# Altium PCB 400861.PcbDoc (part 7 of 7)
Units mm, origin at the board's own origin, x right, y up, seen from the top; angles counter-clockwise.
Board outline 145 x 63.5 mm, 8 copper layers (Top Side, Mid-Layer 1, Mid-Layer 2, Mid-Layer 3, Mid-Layer 4, Mid-Layer 5, Mid-Layer 6, Bottom Side), stack 1.529 mm thick; 287 components, 241 nets, 1164 pads, 3527 vias.
Unrouted connection lines stored in the file: 1.
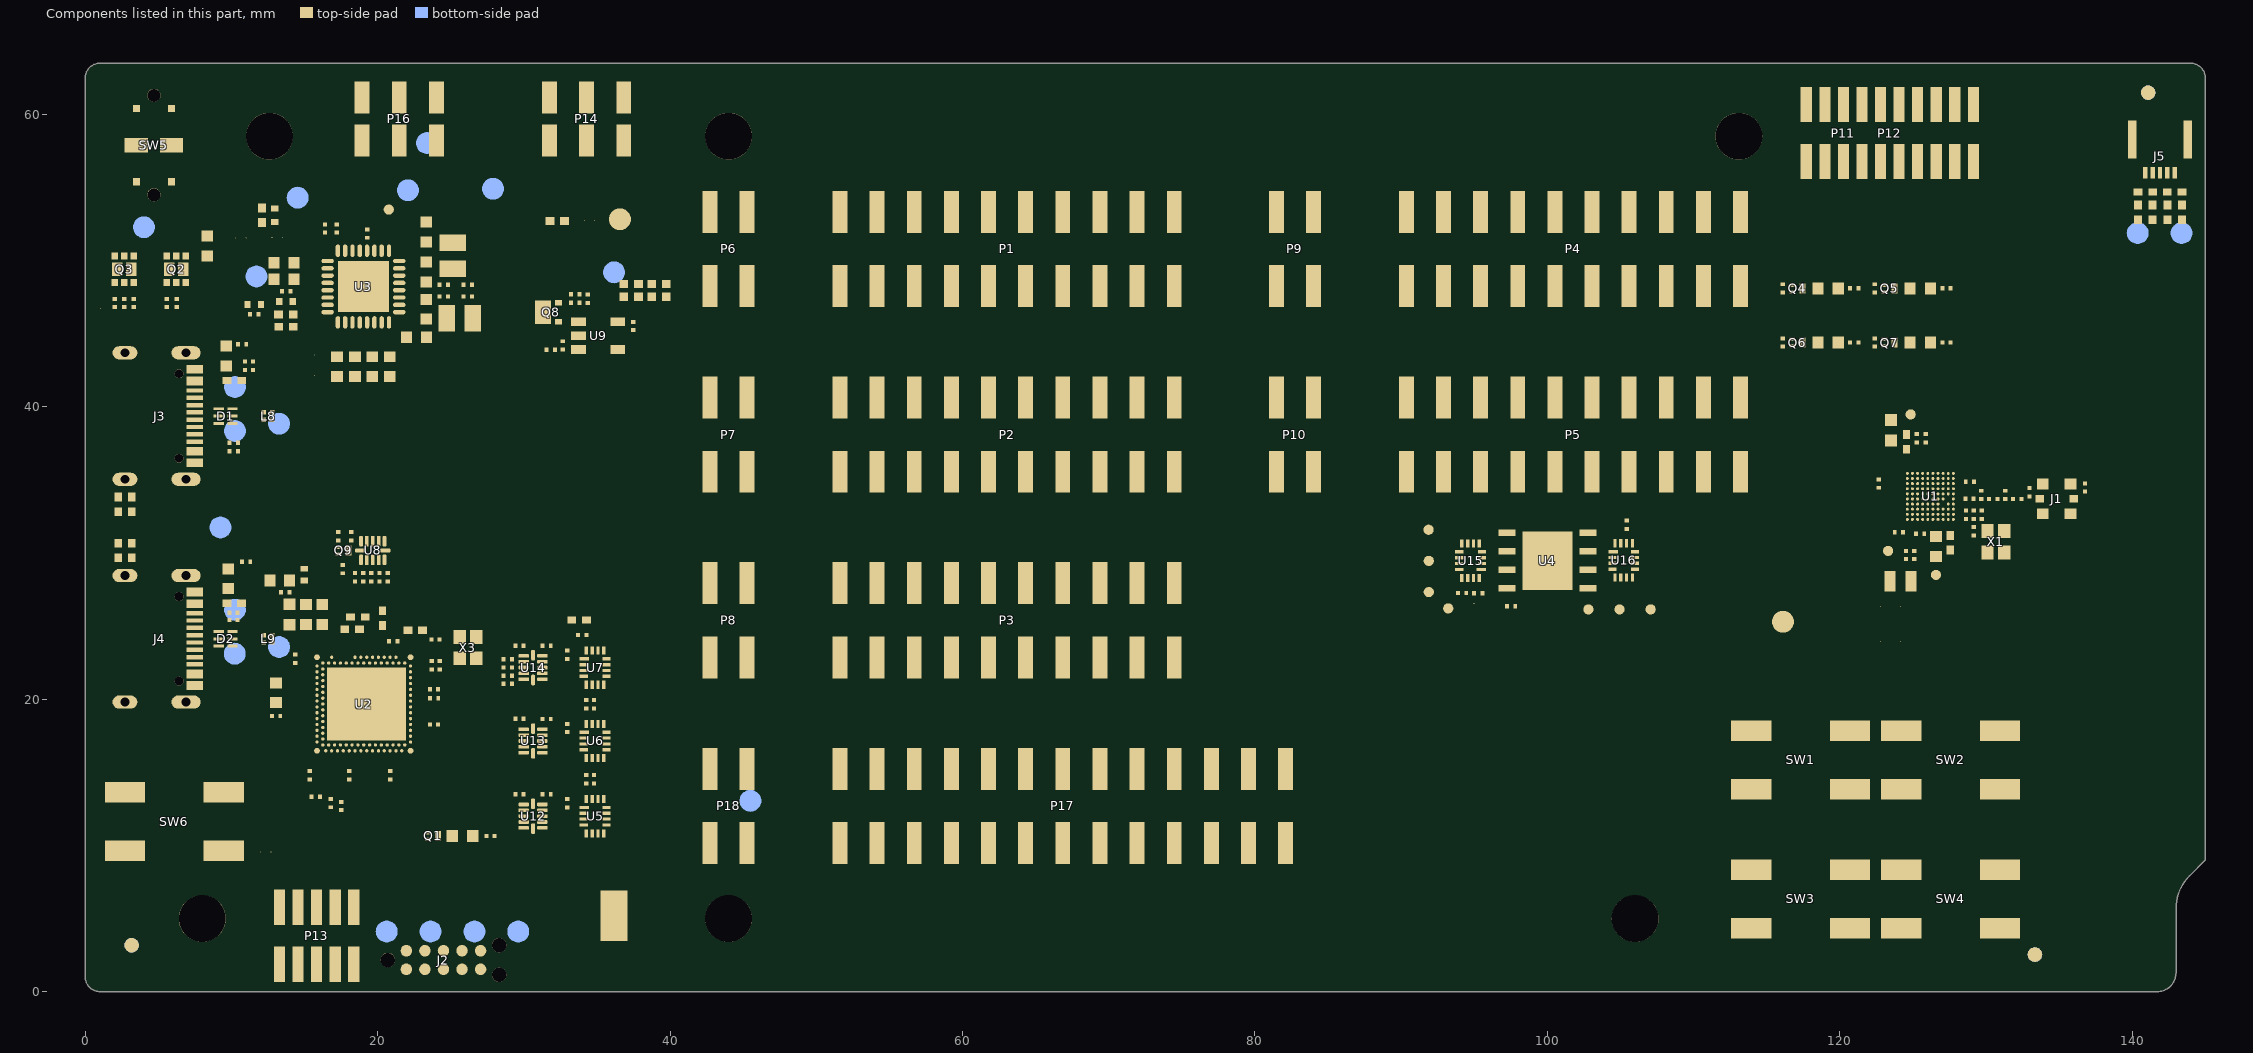
[diagram p12: the components of this part, seen from the top]

## Silkscreen, mask and mechanical layers (free items; w line width, h text height) (continued)
Bottom Overlay:
  drawing of 205 lines, arcs and shapes, not listed
  text "(P5V0)" at 18.86,58.517 h0.64 r180
  text "(P5V0_LED)" at 25.991,53.645 h0.64 r180
  text "(P3V3_IO)" at 19.461,53.545 h0.64 r180
  text "(VBUS)" at 2.36,51.05 h0.64 r180
  text "(GND)" at 34.68,47.763 h0.64 r180
  text "(GND)" at 10.405,47.385 h0.64 r180
  text "P1.19" at 62.004,47.186 h1.91 r180
  text "CTS1" at 68.87,47.076 h1.91 r180
  text "NRESET" at 87.806,46.67 h1.91 r180
  text "nRF54" at 101.949,46.134 h2.03 r180
  text "P1.18" at 62,44.386 h1.91 r180
  text "RTS1" at 68.87,44.383 h1.91 r180
  text "nRF54" at 76.888,44.34 h2.03 r180
  text "SWDCLK" at 87.806,43.041 h1.91 r180
  text "P1.17" at 62,41.686 h1.91 r180
  text "RXD1" at 68.87,41.667 h1.91 r180
  text "(nRF54_P)" at 3.666,41.617 h0.64 r180
  text "DEBUGGER" at 102.025,40.037 h1.4 r180
  text "SWDIO" at 87.806,39.413 h1.91 r180
  text "P1.16" at 62,38.986 h1.91 r180
  text "TXD1" at 68.87,38.962 h1.91 r180
  text "(nRF54_N)" at 3.666,38.617 h0.64 r180
  text "PIN" at 76.517,38.54 h1.78 r180
  text "P0.09" at 62,36.286 h1.91 r180
  text "CTS0" at 68.87,36.302 h1.91 r180
  text "P0.05" at 87.8,36.286 h1.91 r180
  text "Button 3" at 93.724,36.29 h1.91 r180
  text "RTS0" at 68.87,33.61 h1.91 r180
  text "P1.08" at 87.8,33.586 h1.91 r180
  text "Button 2" at 93.724,33.598 h1.91 r180
  text "P0.08" at 62.001,33.561 h1.91 r180
  text "RXD0" at 68.87,30.904 h1.91 r180
  text "Button 1" at 93.724,30.905 h1.91 r180
  text "P0.07" at 61.993,30.816 h1.91 r180
  text "P1.09" at 87.792,30.816 h1.91 r180
  text "(GND)" at 7.95,30.55 h0.64 r180
  text "DEBUGGER" at 76.536,30.211 h1.4 r180
  text "Button 0" at 93.724,28.904 h1.91 r180
  text "P0.06" at 62.001,28.286 h1.91 r180
  text "TXD0" at 68.87,28.212 h1.91 r180
  text "P1.26" at 87.806,28.213 h1.91 r180
  text "(DBGR_N)" at 4.301,26.38 h0.64 r180
  text "P1.28" at 87.806,25.521 h1.91 r180
  text "LED 3" at 93.724,25.508 h1.91 r180
  text "GPIO" at 75.5,25.025 h1.78 r180
  text "P1.02" at 62,24.086 h1.91 r180
  text "NFC2" at 68.87,24.046 h1.91 r180
  text "1M" at 102.675,23.838 h1.27 r180
  text "(DBGR_P)" at 4.301,23.38 h0.64 r180
  text "P1.27" at 87.806,22.828 h1.91 r180
  text "LED 2" at 93.724,22.828 h1.91 r180
  text "0R" at 79.348,22.584 h1.27 r180
  text "N.C" at 76.031,21.88 h1.27 r180
  text "NFC" at 80.351,20.979 h1.78 r180
  text "P1.25" at 87.806,20.136 h1.91 r180
  text "LED 1" at 93.724,20.112 h1.91 r180
  text "P1.01" at 62,18.886 h1.91 r180
  text "NFC1" at 68.972,18.891 h1.91 r180
  text "PIN" at 77.405,17.851 h1.78 r180
  text "P1.22" at 87.806,17.443 h1.91 r180
  text "LED 0" at 93.724,17.441 h1.91 r180
  text "5.0V" at 106.262,16.915 h1.27 r180
  text "GPIO" at 61.123,15.539 h1.78 r180
  text "FUNCTION" at 66.553,15.539 h1.78 r180
  text "HW" at 75.246,15.539 h1.78 r180
  text "GPIO" at 86.967,15.539 h1.78 r180
  text "FUNCTION" at 92.683,15.539 h1.78 r180
  text "HW" at 100.934,15.539 h1.78 r180
  text "(GND)" at 44.205,11.485 h0.64 r180
  text "(VDD_DBGR)" at 20.703,6.373 h0.64 r270
  text "(DBGR_RESET)" at 23.624,6.373 h0.64 r270
  text "(DBGR_SWDIO)" at 26.592,6.373 h0.64 r270
  text "(DBGR_SWDCLK)" at 29.593,6.373 h0.64 r270
Board Outline:
  lines w0.2: 1,0 cw(c1,1) 0,1 0,62.5 cw(c1,62.5) 1,63.5 144.002,63.5 ; 1.001,0 141.705,0 ccw(c141.705,1.295) 143,1.295 143,5.705 cw(c146.127,5.705) 143.916,7.916 145,9 145,62.5 ccw(c144,62.5) 144,63.5
Top Impedance:
  lines w0.09: 7.484,39.12 7.203,39.401 cw(c7.438,39.636) 7.105,39.636 cw(c7.356,39.636) 7.179,39.814 7.485,40.12 ; 7.485,23.384 7.485,23.385 7.683,23.582 ccw(c7.367,23.897) 7.813,23.897 ccw(c7.427,23.897) 7.7,24.171 7.486,24.385 ; 7.485,23.884 7.271,24.099 cw(c7.544,24.372) 7.157,24.372 cw(c7.604,24.372) 7.288,24.687 7.485,24.884 ; 7.485,38.621 7.791,38.927 ccw(c7.614,39.105) 7.865,39.105 ccw(c7.532,39.105) 7.767,39.34 7.486,39.621 ; 12.8,39.119 cw(c12.932,38.988) 12.932,39.174 13.721,39.174 ccw(c13.721,40.033) 14.328,39.426 cw(c14.84,38.914) 14.84,39.638 15.447,39.638 34.934,39.638 ccw(c34.934,41.303) 36.111,40.125 37.741,41.755 cw(c39.537,39.959) 39.537,42.499 122.867,42.499 cw(c122.867,39.999) 124.634,41.767 125.605,40.796 cw(c123.809,39) 126.349,39 126.349,35.955 ccw(c126.496,35.955) 126.392,35.85 ; 12.8,39.618 ccw(c12.932,39.75) 12.932,39.564 13.721,39.564 ccw(c13.721,40.033) 14.053,39.701 cw(c14.841,38.913) 14.841,40.028 15.608,40.028 34.771,40.028 ccw(c34.771,41.686) 35.943,40.513 37.463,42.033 cw(c39.537,39.959) 39.537,42.892 123.029,42.892 cw(c123.029,40.392) 124.797,42.16 125.883,41.074 cw(c123.809,39) 126.742,39 126.742,35.955 cw(c126.594,35.955) 126.699,35.85
  lines w0.099: 7.485,23.385 8.174,23.385 ccw(c8.174,23.873) 8.519,23.528 cw(c8.776,23.271) 8.776,23.634 9.135,23.634 ; 7.485,24.884 8.127,24.884 cw(c8.127,24.318) 8.527,24.718 ccw(c8.73,24.921) 8.73,24.634 9.135,24.634 ; 7.485,38.621 8.174,38.621 ccw(c8.174,39.109) 8.519,38.764 cw(c8.776,38.507) 8.776,38.87 9.135,38.87 ; 7.485,40.12 8.127,40.12 cw(c8.127,39.554) 8.527,39.955 ccw(c8.73,40.158) 8.73,39.87 9.135,39.87 ; 10.065,23.634 10.566,23.634 ccw(c10.566,24.104) 10.899,23.772 cw(c11.501,23.17) 11.501,24.021 11.87,24.021 cw(c11.87,23.554) 12.2,23.884 ; 10.065,24.634 10.566,24.634 cw(c10.566,24.164) 10.899,24.496 ccw(c11.501,25.098) 11.501,24.247 11.869,24.247 ccw(c11.869,24.715) 12.2,24.384 ; 10.065,38.87 10.566,38.87 ccw(c10.566,39.341) 10.899,39.008 cw(c11.501,38.407) 11.501,39.257 11.87,39.257 cw(c11.87,38.79) 12.2,39.12 ; 10.065,39.87 10.566,39.87 cw(c10.566,39.4) 10.899,39.733 ccw(c11.501,40.334) 11.501,39.483 11.869,39.483 ccw(c11.869,39.951) 12.2,39.62 ; 12.8,23.884 cw(c13.131,23.554) 13.131,24.021 14.792,24.021 cw(c14.792,22.686) 15.736,23.63 16.106,23.26 cw(c15.549,22.703) 16.337,22.703 16.337,22.685 cw(c16.04,22.685) 16.25,22.475 ; 12.8,24.384 ccw(c13.131,24.715) 13.131,24.247 14.792,24.247 cw(c14.792,22.686) 15.896,23.79 16.266,23.42 cw(c15.549,22.703) 16.563,22.703 16.563,22.685 ccw(c16.86,22.685) 16.65,22.475
  lines w0.15: 8.712,39.378 11.544,31.934 ; 8.828,24.459 11.591,31.864 ; 11.475,24.482 11.591,31.864 ; 11.637,31.795 14.469,24.35 ; 11.707,39.246 11.591,31.864 ; 14.353,39.269 11.591,31.864 ; 51.061,41.33 55.536,33.705
  lines w0.639: 132.65,33.694 133.659,33.694
  text "(Mid-Layer 3)" at 66.74,32.272 h0.64
  text "90ohm Coplanar Differential" at 49.865,32.247 h0.64
  text "(Top-Layer)" at 30.65,31.587 h0.64
  text "90ohm Coplanar Differential" at 13.775,31.562 h0.64
  text "(Top-Layer)" at 134.554,31.284 h0.64
  text "50ohm Coplanar" at 124.249,31.125 h0.64
  text "Reference layer: Mid-Layer 2 and 4" at 49.865,31.022 h0.64
  text "Reference layer: Mid-Layer 1" at 13.775,30.337 h0.64
  text "Reference layer: Bottom Layer" at 124.249,29.9 h0.64

## Dimensions
113.1,66.326 to 145,62.5 on Dimension
44,66.326 to 113.1,58.5 on Dimension
12.6,66.326 to 44,58.5 on Dimension
0,62.5 to 12.6,58.5 on Dimension
-3.205,58.5 to 1,63.5 on Dimension
-3.205,5 to 12.6,58.5 on Dimension
145,9 to 106,-4.114 on Dimension
44,-4.114 to 106,5 on Dimension
8,-4.114 to 44,5 on Dimension
0,0 to 8,5 on Dimension
0,0 to 8,5 on Dimension

## Text inside footprints (layer, text, board x,y; h text height)
J3: Top Placement "Board Edge" at 0.685,41.39 h0.38 r270
J4: Top Placement "Board Edge" at 0.685,26.154 h0.38 r270
LOGO3: Bottom Overlay "S" at 14.504,4.725 h1.35 r270; Bottom Overlay "E" at 14.504,5.614 h1.35 r270; Bottom Overlay "G" at 14.504,6.398 h1.35 r270; Bottom Overlay "G" at 14.504,7.389 h1.35 r270; Bottom Overlay "E" at 14.504,8.413 h1.35 r270; Bottom Overlay "R" at 14.504,9.248 h1.35 r270; Bottom Overlay "TM" at 13.066,4.511 h0.94 r270; Bottom Overlay "www.segger.com" at 11.494,1.123 h1.68 r270; Bottom Overlay "J-Link" at 12.645,1.042 h1.45 r270; Bottom Overlay "Technology" at 12.645,5.794 h1.45 r270